# EAGLE board TGO-Panel (EAGLE 9.1.3), part 1 of 2
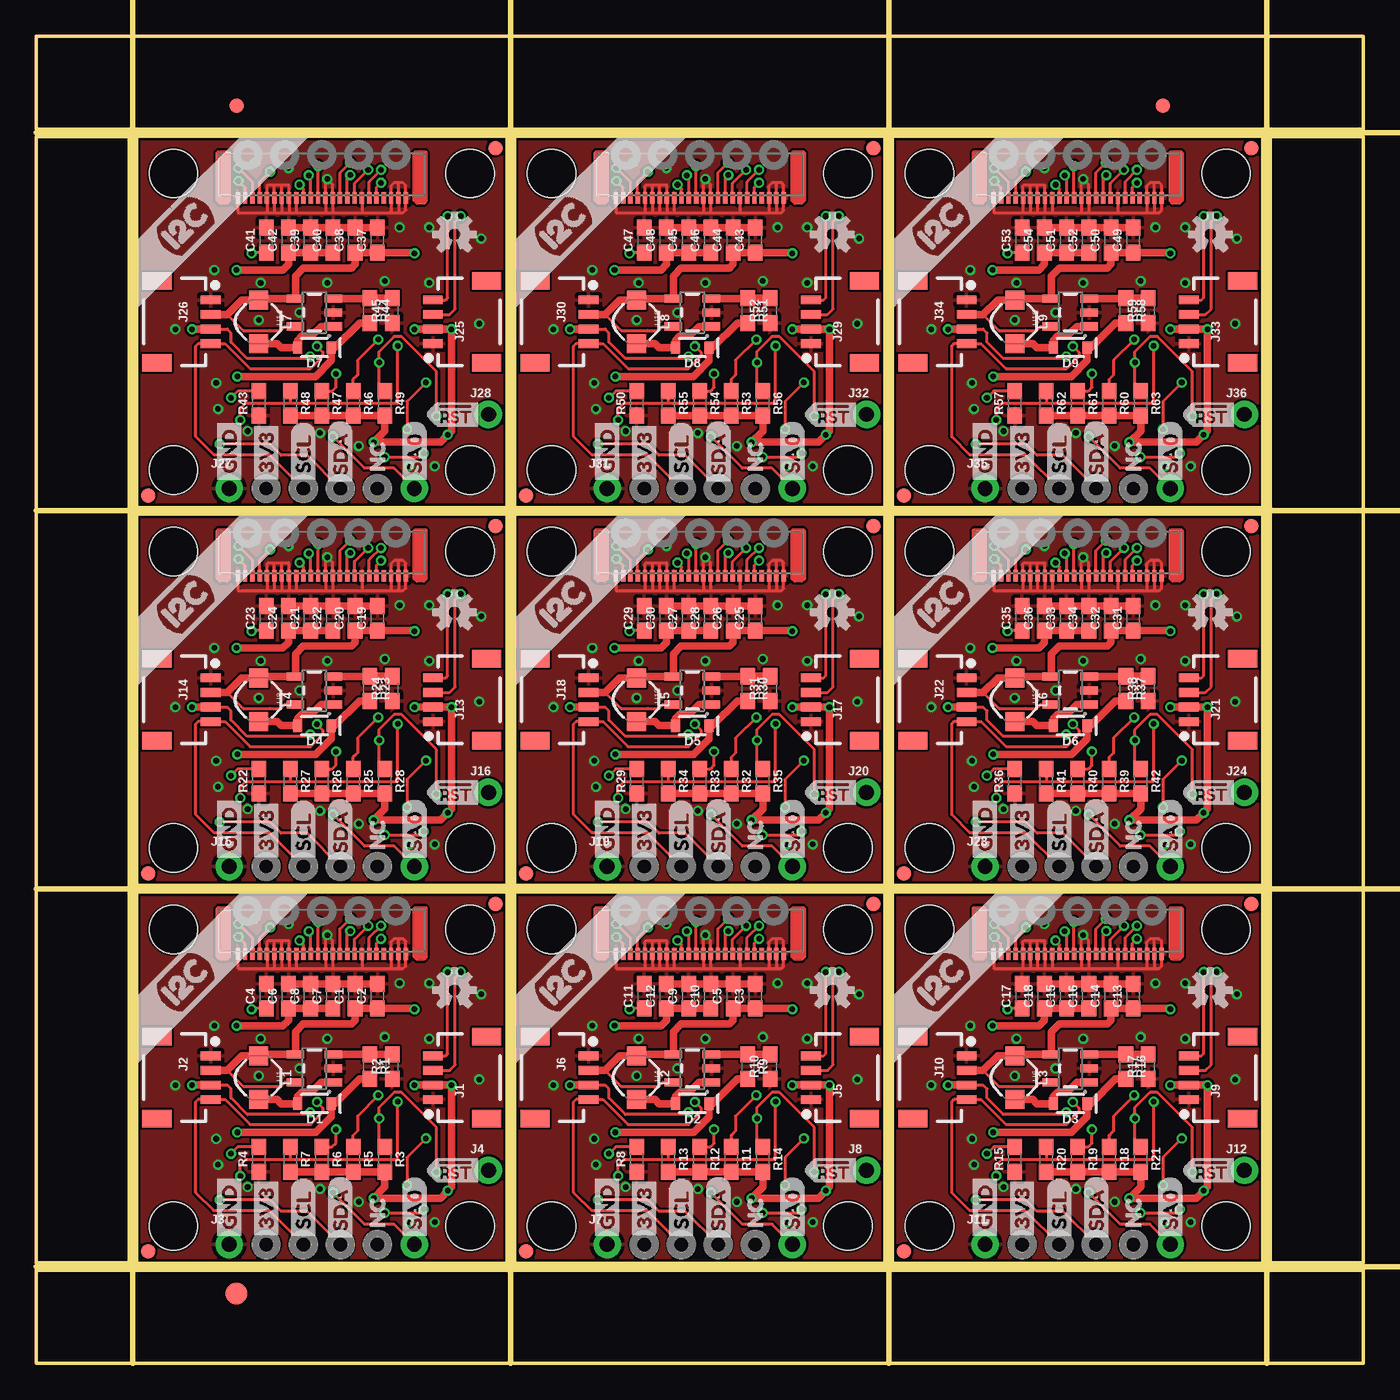
[diagram p0: board, top side]
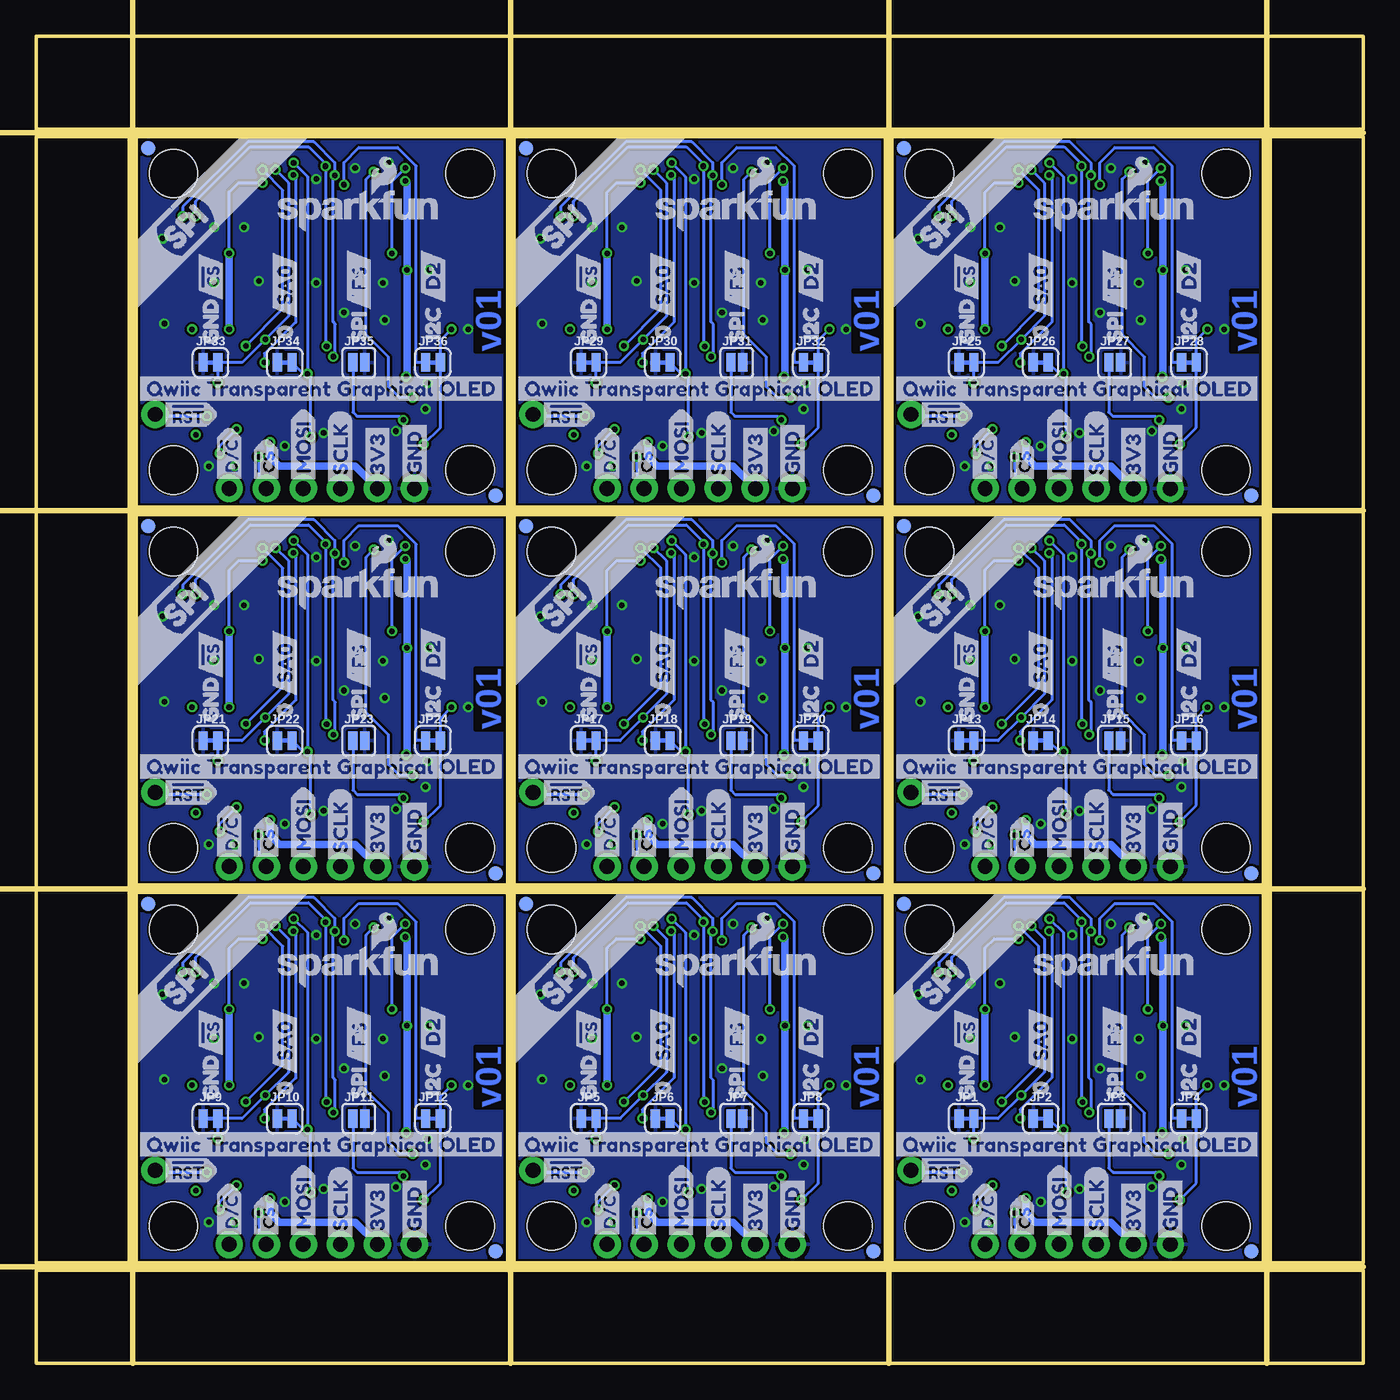
[diagram p1: board, bottom side, seen from below]

Size 90.93 x 90.93 mm. Coordinates in mm from the lower left corner, seen from the top.
Outline: 6.86,6.86 32.26,6.86 32.26,32.26 6.86,32.26 6.86,6.86
Outline: 32.77,6.86 58.17,6.86 58.17,32.26 32.77,32.26 32.77,6.86
Outline: 58.67,6.86 84.07,6.86 84.07,32.26 58.67,32.26 58.67,6.86
Outline: 6.86,32.77 32.26,32.77 32.26,58.17 6.86,58.17 6.86,32.77
Outline: 32.77,32.77 58.17,32.77 58.17,58.17 32.77,58.17 32.77,32.77
Outline: 58.67,32.77 84.07,32.77 84.07,58.17 58.67,58.17 58.67,32.77
Outline: 6.86,58.67 32.26,58.67 32.26,84.07 6.86,84.07 6.86,58.67
Outline: 32.77,58.67 58.17,58.67 58.17,84.07 32.77,84.07 32.77,58.67
Outline: 58.67,58.67 84.07,58.67 84.07,84.07 58.67,84.07 58.67,58.67
Outline: 0,6.35 90.93,6.35 90.93,0 0,0 0,6.35
Outline: 84.58,84.07 90.93,84.07 90.93,6.86 84.58,6.86 84.58,84.07
Outline: 0,90.93 90.93,90.93 90.93,84.58 0,84.58 0,90.93
Outline: 0,84.07 6.35,84.07 6.35,6.86 0,6.86 0,84.07
Copper layers (1*16): Top 0.035mm / dielectric 1.5mm / Bottom 0.035mm
Design rules "SparkFun-2-layer-PCBWay-LIMIT": minimum track width 6mil, minimum drill 0.3mm, track to track 6mil, track to pad 6mil, pad to pad 6mil, via to via 6mil, smd to smd 6mil, copper to edge 6mil, drill to drill 6mil, minimum pad ring 6mil, minimum via ring 6mil, stop-mask expansion 4mil, vias tented up to drill 25mil, thermal gap 10mil
Milling: 8 lines

## Footprints (pad centres in the part's own frame; a part is rotated, then mirrored left to right if it is on the bottom)
0603 = smd 1.1 x 1: 1 -0.85,0; 2 0.85,0
SOD-323 = smd 0.63 x 0.83: A 1.15,0; C -1.15,0
FIDUCIAL-1X2 = smd 1 x 1: 1 0,0
FIDUCIAL-1.5X3 = smd 1.5 x 1.5: 1 0,0
1X04_1MM_RA = smd 0.6 x 1.35: 1 -1.5,0; 2 -0.5,0; 3 0.5,0; 4 1.5,0 | smd 1.2 x 2: NC1 2.8,-3.675; NC2 -2.8,-3.675
1X06_NO_SILK = drill 1.016 pad 1.88: 1 0,0; 2 2.54,0; 3 5.08,0; 4 7.62,0; 5 10.16,0; 6 12.7,0
1X01_NO_SILK = drill 1.016 pad 1.88: 1 0,0
SMT-JUMPER_2_NC_TRACE_SILK = smd 0.635 x 1.27: 1 -0.508,0; 2 0.508,0
SMT-JUMPER_2_NO_SILK = smd 0.635 x 1.27: 1 -0.406,0; 2 0.406,0
INDUCTOR_4.7UH = smd 1.3 x 1.3: P$1 -1.5,0; P$2 1.5,0
SOT23-5 = smd 0.55 x 1.2: 1 -0.95,-1.3; 2 0,-1.3; 3 0.95,-1.3; 4 0.95,1.3; 5 -0.95,1.3
FPC05024-42201 = smd 0.3 x 0.8: P$1 -5.75,0.4; P$2 -5.25,0.4; P$3 -4.75,0.4; P$4 -4.25,0.4; P$5 -3.75,0.4; P$6 -3.25,0.4; P$7 -2.75,0.4; P$8 -2.25,0.4; P$9 -1.75,0.4; P$10 -1.25,0.4; P$11 -0.75,0.4; P$12 -0.25,0.4; P$13 0.25,0.4; P$14 0.75,0.4; P$15 1.25,0.4; P$16 1.75,0.4; P$17 2.25,0.4; P$18 2.75,0.4; P$19 3.25,0.4; P$20 3.75,0.4; P$21 4.25,0.4; P$22 4.75,0.4; P$23 5.25,0.4; P$24 5.75,0.4
QWIIC_BOARD_MOUNT_HOLES = hole 3.302: -10.16,10.16; 10.16,10.16; 10.16,-10.16; -10.16,-10.16

## Placement (x,y rotation side)
C1  4.7uF  [0603]  21.84,25.15 90 top
C2  0.1uF  [0603]  23.37,25.15 90 top
C3  0.1uF  [0603]  49.28,25.15 90 top
C4  4.7uF  [0603]  15.75,25.15 90 top
C5  4.7uF  [0603]  47.75,25.15 90 top
C6  4.7uF  [0603]  17.27,25.15 90 top
C7  4.7uF  [0603]  20.32,25.15 90 top
C8  0.1uF  [0603]  18.8,25.15 90 top
C9  0.1uF  [0603]  44.7,25.15 90 top
C10  4.7uF  [0603]  46.23,25.15 90 top
C11  4.7uF  [0603]  41.66,25.15 90 top
C12  4.7uF  [0603]  43.18,25.15 90 top
C13  0.1uF  [0603]  75.18,25.15 90 top
C14  4.7uF  [0603]  73.66,25.15 90 top
C15  0.1uF  [0603]  70.61,25.15 90 top
C16  4.7uF  [0603]  72.14,25.15 90 top
C17  4.7uF  [0603]  67.56,25.15 90 top
C18  4.7uF  [0603]  69.09,25.15 90 top
C19  0.1uF  [0603]  23.37,51.05 90 top
C20  4.7uF  [0603]  21.84,51.05 90 top
C21  0.1uF  [0603]  18.8,51.05 90 top
C22  4.7uF  [0603]  20.32,51.05 90 top
C23  4.7uF  [0603]  15.75,51.05 90 top
C24  4.7uF  [0603]  17.27,51.05 90 top
C25  0.1uF  [0603]  49.28,51.05 90 top
C26  4.7uF  [0603]  47.75,51.05 90 top
C27  0.1uF  [0603]  44.7,51.05 90 top
C28  4.7uF  [0603]  46.23,51.05 90 top
C29  4.7uF  [0603]  41.66,51.05 90 top
C30  4.7uF  [0603]  43.18,51.05 90 top
C31  0.1uF  [0603]  75.18,51.05 90 top
C32  4.7uF  [0603]  73.66,51.05 90 top
C33  0.1uF  [0603]  70.61,51.05 90 top
C34  4.7uF  [0603]  72.14,51.05 90 top
C35  4.7uF  [0603]  67.56,51.05 90 top
C36  4.7uF  [0603]  69.09,51.05 90 top
C37  0.1uF  [0603]  23.37,76.96 90 top
C38  4.7uF  [0603]  21.84,76.96 90 top
C39  0.1uF  [0603]  18.8,76.96 90 top
C40  4.7uF  [0603]  20.32,76.96 90 top
C41  4.7uF  [0603]  15.75,76.96 90 top
C42  4.7uF  [0603]  17.27,76.96 90 top
C43  0.1uF  [0603]  49.28,76.96 90 top
C44  4.7uF  [0603]  47.75,76.96 90 top
C45  0.1uF  [0603]  44.7,76.96 90 top
C46  4.7uF  [0603]  46.23,76.96 90 top
C47  4.7uF  [0603]  41.66,76.96 90 top
C48  4.7uF  [0603]  43.18,76.96 90 top
C49  0.1uF  [0603]  75.18,76.96 90 top
C50  4.7uF  [0603]  73.66,76.96 90 top
C51  0.1uF  [0603]  70.61,76.96 90 top
C52  4.7uF  [0603]  72.14,76.96 90 top
C53  4.7uF  [0603]  67.56,76.96 90 top
C54  4.7uF  [0603]  69.09,76.96 90 top
D1  1A/23V/620mV  [SOD-323]  19.05,17.78 180 top
D2  1A/23V/620mV  [SOD-323]  44.96,17.78 180 top
D3  1A/23V/620mV  [SOD-323]  70.87,17.78 180 top
D4  1A/23V/620mV  [SOD-323]  19.05,43.69 180 top
D5  1A/23V/620mV  [SOD-323]  44.96,43.69 180 top
D6  1A/23V/620mV  [SOD-323]  70.87,43.69 180 top
D7  1A/23V/620mV  [SOD-323]  19.05,69.6 180 top
D8  1A/23V/620mV  [SOD-323]  44.96,69.6 180 top
D9  1A/23V/620mV  [SOD-323]  70.87,69.6 180 top
E$1  [FIDUCIAL-1X2]  13.72,86.17 0 top
E$2  [FIDUCIAL-1X2]  77.22,86.17 0 top
E$3  [FIDUCIAL-1.5X3]  13.72,4.76 0 top
FD1  FIDUCIAL1X2  [FIDUCIAL-1X2]  7.65,7.65 0 top
FD2  FIDUCIAL1X2  [FIDUCIAL-1X2]  7.65,7.65 0 bottom
FD3  FIDUCIAL1X2  [FIDUCIAL-1X2]  31.46,31.46 0 top
FD4  FIDUCIAL1X2  [FIDUCIAL-1X2]  31.46,31.46 0 bottom
FD5  FIDUCIAL1X2  [FIDUCIAL-1X2]  57.37,31.46 0 top
FD6  FIDUCIAL1X2  [FIDUCIAL-1X2]  33.56,7.65 0 top
FD7  FIDUCIAL1X2  [FIDUCIAL-1X2]  33.56,7.65 0 bottom
FD8  FIDUCIAL1X2  [FIDUCIAL-1X2]  57.37,31.46 0 bottom
FD9  FIDUCIAL1X2  [FIDUCIAL-1X2]  83.28,31.46 0 top
FD10  FIDUCIAL1X2  [FIDUCIAL-1X2]  59.47,7.65 0 top
FD11  FIDUCIAL1X2  [FIDUCIAL-1X2]  59.47,7.65 0 bottom
FD12  FIDUCIAL1X2  [FIDUCIAL-1X2]  83.28,31.46 0 bottom
FD13  FIDUCIAL1X2  [FIDUCIAL-1X2]  31.46,57.37 0 top
FD14  FIDUCIAL1X2  [FIDUCIAL-1X2]  7.65,33.56 0 top
FD15  FIDUCIAL1X2  [FIDUCIAL-1X2]  7.65,33.56 0 bottom
FD16  FIDUCIAL1X2  [FIDUCIAL-1X2]  31.46,57.37 0 bottom
FD17  FIDUCIAL1X2  [FIDUCIAL-1X2]  57.37,57.37 0 top
FD18  FIDUCIAL1X2  [FIDUCIAL-1X2]  33.56,33.56 0 top
FD19  FIDUCIAL1X2  [FIDUCIAL-1X2]  33.56,33.56 0 bottom
FD20  FIDUCIAL1X2  [FIDUCIAL-1X2]  57.37,57.37 0 bottom
FD21  FIDUCIAL1X2  [FIDUCIAL-1X2]  83.28,57.37 0 top
FD22  FIDUCIAL1X2  [FIDUCIAL-1X2]  59.47,33.56 0 top
FD23  FIDUCIAL1X2  [FIDUCIAL-1X2]  59.47,33.56 0 bottom
FD24  FIDUCIAL1X2  [FIDUCIAL-1X2]  83.28,57.37 0 bottom
FD25  FIDUCIAL1X2  [FIDUCIAL-1X2]  31.46,83.28 0 top
FD26  FIDUCIAL1X2  [FIDUCIAL-1X2]  7.65,59.47 0 top
FD27  FIDUCIAL1X2  [FIDUCIAL-1X2]  7.65,59.47 0 bottom
FD28  FIDUCIAL1X2  [FIDUCIAL-1X2]  31.46,83.28 0 bottom
FD29  FIDUCIAL1X2  [FIDUCIAL-1X2]  57.37,83.28 0 top
FD30  FIDUCIAL1X2  [FIDUCIAL-1X2]  33.56,59.47 0 top
FD31  FIDUCIAL1X2  [FIDUCIAL-1X2]  33.56,59.47 0 bottom
FD32  FIDUCIAL1X2  [FIDUCIAL-1X2]  57.37,83.28 0 bottom
FD33  FIDUCIAL1X2  [FIDUCIAL-1X2]  83.28,83.28 0 top
FD34  FIDUCIAL1X2  [FIDUCIAL-1X2]  59.47,59.47 0 top
FD35  FIDUCIAL1X2  [FIDUCIAL-1X2]  59.47,59.47 0 bottom
FD36  FIDUCIAL1X2  [FIDUCIAL-1X2]  83.28,83.28 0 bottom
J1  [1X04_1MM_RA]  27.18,19.56 90 top
J2  [1X04_1MM_RA]  11.94,19.56 270 top
J3  [1X06_NO_SILK]  13.21,8.13 0 top
J4  [1X01_NO_SILK]  30.99,13.21 0 top
J5  [1X04_1MM_RA]  53.09,19.56 90 top
J6  [1X04_1MM_RA]  37.85,19.56 270 top
J7  [1X06_NO_SILK]  39.12,8.13 0 top
J8  [1X01_NO_SILK]  56.9,13.21 0 top
J9  [1X04_1MM_RA]  78.99,19.56 90 top
J10  [1X04_1MM_RA]  63.75,19.56 270 top
J11  [1X06_NO_SILK]  65.02,8.13 0 top
J12  [1X01_NO_SILK]  82.8,13.21 0 top
J13  [1X04_1MM_RA]  27.18,45.47 90 top
J14  [1X04_1MM_RA]  11.94,45.47 270 top
J15  [1X06_NO_SILK]  13.21,34.04 0 top
J16  [1X01_NO_SILK]  30.99,39.12 0 top
J17  [1X04_1MM_RA]  53.09,45.47 90 top
J18  [1X04_1MM_RA]  37.85,45.47 270 top
J19  [1X06_NO_SILK]  39.12,34.04 0 top
J20  [1X01_NO_SILK]  56.9,39.12 0 top
J21  [1X04_1MM_RA]  78.99,45.47 90 top
J22  [1X04_1MM_RA]  63.75,45.47 270 top
J23  [1X06_NO_SILK]  65.02,34.04 0 top
J24  [1X01_NO_SILK]  82.8,39.12 0 top
J25  [1X04_1MM_RA]  27.18,71.37 90 top
J26  [1X04_1MM_RA]  11.94,71.37 270 top
J27  [1X06_NO_SILK]  13.21,59.94 0 top
J28  [1X01_NO_SILK]  30.99,65.02 0 top
J29  [1X04_1MM_RA]  53.09,71.37 90 top
J30  [1X04_1MM_RA]  37.85,71.37 270 top
J31  [1X06_NO_SILK]  39.12,59.94 0 top
J32  [1X01_NO_SILK]  56.9,65.02 0 top
J33  [1X04_1MM_RA]  78.99,71.37 90 top
J34  [1X04_1MM_RA]  63.75,71.37 270 top
J35  [1X06_NO_SILK]  65.02,59.94 0 top
J36  [1X01_NO_SILK]  82.8,65.02 0 top
JP1  CSP  [SMT-JUMPER_2_NC_TRACE_SILK]  27.18,16.76 0 bottom
JP2  SAS  [SMT-JUMPER_2_NC_TRACE_SILK]  22.1,16.76 0 bottom
JP3  IFS  [SMT-JUMPER_2_NO_SILK]  17.02,16.76 0 bottom
JP4  I2C  [SMT-JUMPER_2_NC_TRACE_SILK]  11.94,16.76 0 bottom
JP5  CSP  [SMT-JUMPER_2_NC_TRACE_SILK]  53.09,16.76 0 bottom
JP6  SAS  [SMT-JUMPER_2_NC_TRACE_SILK]  48.01,16.76 0 bottom
JP7  IFS  [SMT-JUMPER_2_NO_SILK]  42.93,16.76 0 bottom
JP8  I2C  [SMT-JUMPER_2_NC_TRACE_SILK]  37.85,16.76 0 bottom
JP9  CSP  [SMT-JUMPER_2_NC_TRACE_SILK]  78.99,16.76 0 bottom
JP10  SAS  [SMT-JUMPER_2_NC_TRACE_SILK]  73.91,16.76 0 bottom
JP11  IFS  [SMT-JUMPER_2_NO_SILK]  68.83,16.76 0 bottom
JP12  I2C  [SMT-JUMPER_2_NC_TRACE_SILK]  63.75,16.76 0 bottom
JP13  CSP  [SMT-JUMPER_2_NC_TRACE_SILK]  27.18,42.67 0 bottom
JP14  SAS  [SMT-JUMPER_2_NC_TRACE_SILK]  22.1,42.67 0 bottom
JP15  IFS  [SMT-JUMPER_2_NO_SILK]  17.02,42.67 0 bottom
JP16  I2C  [SMT-JUMPER_2_NC_TRACE_SILK]  11.94,42.67 0 bottom
JP17  CSP  [SMT-JUMPER_2_NC_TRACE_SILK]  53.09,42.67 0 bottom
JP18  SAS  [SMT-JUMPER_2_NC_TRACE_SILK]  48.01,42.67 0 bottom
JP19  IFS  [SMT-JUMPER_2_NO_SILK]  42.93,42.67 0 bottom
JP20  I2C  [SMT-JUMPER_2_NC_TRACE_SILK]  37.85,42.67 0 bottom
JP21  CSP  [SMT-JUMPER_2_NC_TRACE_SILK]  78.99,42.67 0 bottom
JP22  SAS  [SMT-JUMPER_2_NC_TRACE_SILK]  73.91,42.67 0 bottom
JP23  IFS  [SMT-JUMPER_2_NO_SILK]  68.83,42.67 0 bottom
JP24  I2C  [SMT-JUMPER_2_NC_TRACE_SILK]  63.75,42.67 0 bottom
JP25  CSP  [SMT-JUMPER_2_NC_TRACE_SILK]  27.18,68.58 0 bottom
JP26  SAS  [SMT-JUMPER_2_NC_TRACE_SILK]  22.1,68.58 0 bottom
JP27  IFS  [SMT-JUMPER_2_NO_SILK]  17.02,68.58 0 bottom
JP28  I2C  [SMT-JUMPER_2_NC_TRACE_SILK]  11.94,68.58 0 bottom
JP29  CSP  [SMT-JUMPER_2_NC_TRACE_SILK]  53.09,68.58 0 bottom
JP30  SAS  [SMT-JUMPER_2_NC_TRACE_SILK]  48.01,68.58 0 bottom
JP31  IFS  [SMT-JUMPER_2_NO_SILK]  42.93,68.58 0 bottom
JP32  I2C  [SMT-JUMPER_2_NC_TRACE_SILK]  37.85,68.58 0 bottom
JP33  CSP  [SMT-JUMPER_2_NC_TRACE_SILK]  78.99,68.58 0 bottom
JP34  SAS  [SMT-JUMPER_2_NC_TRACE_SILK]  73.91,68.58 0 bottom
JP35  IFS  [SMT-JUMPER_2_NO_SILK]  68.83,68.58 0 bottom
JP36  I2C  [SMT-JUMPER_2_NC_TRACE_SILK]  63.75,68.58 0 bottom
L1  10uH  [INDUCTOR_4.7UH]  15.24,19.56 270 top
L2  10uH  [INDUCTOR_4.7UH]  41.15,19.56 270 top
L3  10uH  [INDUCTOR_4.7UH]  67.06,19.56 270 top
L4  10uH  [INDUCTOR_4.7UH]  15.24,45.47 270 top
L5  10uH  [INDUCTOR_4.7UH]  41.15,45.47 270 top
L6  10uH  [INDUCTOR_4.7UH]  67.06,45.47 270 top
L7  10uH  [INDUCTOR_4.7UH]  15.24,71.37 270 top
L8  10uH  [INDUCTOR_4.7UH]  41.15,71.37 270 top
L9  10uH  [INDUCTOR_4.7UH]  67.06,71.37 270 top
LOGO1  SFE_LOGO_NAME_FLAME.1_INCH  [SFE_LOGO_NAME_FLAME_.1]  17.02,27.18 0 bottom
LOGO2  OSHW-LOGOS  [OSHW-LOGO-S]  28.65,25.55 0 top
LOGO3  OSHW-LOGOS  [OSHW-LOGO-S]  54.56,25.55 0 top
LOGO4  SFE_LOGO_NAME_FLAME.1_INCH  [SFE_LOGO_NAME_FLAME_.1]  42.93,27.18 0 bottom
LOGO5  OSHW-LOGOS  [OSHW-LOGO-S]  80.47,25.55 0 top
LOGO6  SFE_LOGO_NAME_FLAME.1_INCH  [SFE_LOGO_NAME_FLAME_.1]  68.83,27.18 0 bottom
LOGO7  OSHW-LOGOS  [OSHW-LOGO-S]  28.65,51.46 0 top
LOGO8  SFE_LOGO_NAME_FLAME.1_INCH  [SFE_LOGO_NAME_FLAME_.1]  17.02,53.09 0 bottom
LOGO9  OSHW-LOGOS  [OSHW-LOGO-S]  54.56,51.46 0 top
LOGO10  SFE_LOGO_NAME_FLAME.1_INCH  [SFE_LOGO_NAME_FLAME_.1]  42.93,53.09 0 bottom
LOGO11  OSHW-LOGOS  [OSHW-LOGO-S]  80.47,51.46 0 top
LOGO12  SFE_LOGO_NAME_FLAME.1_INCH  [SFE_LOGO_NAME_FLAME_.1]  68.83,53.09 0 bottom
LOGO13  OSHW-LOGOS  [OSHW-LOGO-S]  28.65,77.37 0 top
LOGO14  SFE_LOGO_NAME_FLAME.1_INCH  [SFE_LOGO_NAME_FLAME_.1]  17.02,78.99 0 bottom
LOGO15  OSHW-LOGOS  [OSHW-LOGO-S]  54.56,77.37 0 top
LOGO16  SFE_LOGO_NAME_FLAME.1_INCH  [SFE_LOGO_NAME_FLAME_.1]  42.93,78.99 0 bottom
LOGO17  OSHW-LOGOS  [OSHW-LOGO-S]  80.47,77.37 0 top
LOGO18  SFE_LOGO_NAME_FLAME.1_INCH  [SFE_LOGO_NAME_FLAME_.1]  68.83,78.99 0 bottom
R1  47k  [0603]  22.86,20.32 270 top
R2  5.6k  [0603]  24.38,20.32 90 top
R3  10k  [0603]  23.88,13.97 270 top
R4  100k  [0603]  15.24,13.97 90 top
R5  10k  [0603]  21.72,13.97 270 top
R6  10k  [0603]  19.56,13.97 270 top
R7  10k  [0603]  17.4,13.97 270 top
R8  100k  [0603]  41.15,13.97 90 top
R9  47k  [0603]  48.77,20.32 270 top
R10  5.6k  [0603]  50.29,20.32 90 top
R11  10k  [0603]  47.62,13.97 270 top
R12  10k  [0603]  45.47,13.97 270 top
R13  10k  [0603]  43.31,13.97 270 top
R14  10k  [0603]  49.78,13.97 270 top
R15  100k  [0603]  67.06,13.97 90 top
R16  47k  [0603]  74.68,20.32 270 top
R17  5.6k  [0603]  76.2,20.32 90 top
R18  10k  [0603]  73.53,13.97 270 top
R19  10k  [0603]  71.37,13.97 270 top
R20  10k  [0603]  69.22,13.97 270 top
R21  10k  [0603]  75.69,13.97 270 top
R22  100k  [0603]  15.24,39.88 90 top
R23  47k  [0603]  22.86,46.23 270 top
R24  5.6k  [0603]  24.38,46.23 90 top
R25  10k  [0603]  21.72,39.88 270 top
R26  10k  [0603]  19.56,39.88 270 top
R27  10k  [0603]  17.4,39.88 270 top
R28  10k  [0603]  23.88,39.88 270 top
R29  100k  [0603]  41.15,39.88 90 top
R30  47k  [0603]  48.77,46.23 270 top
R31  5.6k  [0603]  50.29,46.23 90 top
R32  10k  [0603]  47.62,39.88 270 top
R33  10k  [0603]  45.47,39.88 270 top
R34  10k  [0603]  43.31,39.88 270 top
R35  10k  [0603]  49.78,39.88 270 top
R36  100k  [0603]  67.06,39.88 90 top
R37  47k  [0603]  74.68,46.23 270 top
R38  5.6k  [0603]  76.2,46.23 90 top
R39  10k  [0603]  73.53,39.88 270 top
R40  10k  [0603]  71.37,39.88 270 top
R41  10k  [0603]  69.22,39.88 270 top
R42  10k  [0603]  75.69,39.88 270 top
R43  100k  [0603]  15.24,65.79 90 top
R44  47k  [0603]  22.86,72.14 270 top
R45  5.6k  [0603]  24.38,72.14 90 top
R46  10k  [0603]  21.72,65.79 270 top
R47  10k  [0603]  19.56,65.79 270 top
R48  10k  [0603]  17.4,65.79 270 top
R49  10k  [0603]  23.88,65.79 270 top
R50  100k  [0603]  41.15,65.79 90 top
R51  47k  [0603]  48.77,72.14 270 top
R52  5.6k  [0603]  50.29,72.14 90 top
R53  10k  [0603]  47.62,65.79 270 top
R54  10k  [0603]  45.47,65.79 270 top
R55  10k  [0603]  43.31,65.79 270 top
R56  10k  [0603]  49.78,65.79 270 top
R57  100k  [0603]  67.06,65.79 90 top
R58  47k  [0603]  74.68,72.14 270 top
R59  5.6k  [0603]  76.2,72.14 90 top
R60  10k  [0603]  73.53,65.79 270 top
R61  10k  [0603]  71.37,65.79 270 top
R62  10k  [0603]  69.22,65.79 270 top
R63  10k  [0603]  75.69,65.79 270 top
U1  AP3012  [SOT23-5]  19.05,20.19 90 top
U2  SAS1-1U001-A_I2C_4WSPI  [FPC05024-42201]  19.56,28.45 180 top
U3  SAS1-1U001-A_I2C_4WSPI  [FPC05024-42201]  45.47,28.45 180 top
U4  AP3012  [SOT23-5]  44.96,20.19 90 top
U5  SAS1-1U001-A_I2C_4WSPI  [FPC05024-42201]  71.37,28.45 180 top
U6  AP3012  [SOT23-5]  70.87,20.19 90 top
U7  SAS1-1U001-A_I2C_4WSPI  [FPC05024-42201]  19.56,54.36 180 top
U8  AP3012  [SOT23-5]  19.05,46.1 90 top
U9  SAS1-1U001-A_I2C_4WSPI  [FPC05024-42201]  45.47,54.36 180 top
U10  AP3012  [SOT23-5]  44.96,46.1 90 top
U11  SAS1-1U001-A_I2C_4WSPI  [FPC05024-42201]  71.37,54.36 180 top
U12  AP3012  [SOT23-5]  70.87,46.1 90 top
U13  SAS1-1U001-A_I2C_4WSPI  [FPC05024-42201]  19.56,80.26 180 top
U14  AP3012  [SOT23-5]  19.05,72.01 90 top
U15  SAS1-1U001-A_I2C_4WSPI  [FPC05024-42201]  45.47,80.26 180 top
U16  AP3012  [SOT23-5]  44.96,72.01 90 top
U17  SAS1-1U001-A_I2C_4WSPI  [FPC05024-42201]  71.37,80.26 180 top
U18  AP3012  [SOT23-5]  70.87,72.01 90 top
U$1  QWIIC_BOARD_OUTLINEH  [QWIIC_BOARD_MOUNT_HOLES]  19.56,19.56 0 top
U$2  [QWIIC_TRANSPARENT_GRAPHICAL_OLED15]  32.51,14.99 0 bottom
U$3  [D27]  11.94,20.83 90 bottom
U$4  [GND0]  13.21,8.25 90 top
U$5  [3V31]  15.75,8.25 90 top
U$6  [SCL2]  18.29,8.25 90 top
U$7  [SDA3]  20.83,8.13 90 top
U$8  [#CS7]  23.37,8.13 90 bottom
U$9  [NC10]  23.37,8.38 90 top
U$10  [MOSI9]  20.83,8.25 90 bottom
U$11  [SCLK8]  18.29,8.13 90 bottom
U$12  [SA08]  25.91,8.25 90 top
U$13  [3V31]  15.75,8.13 90 bottom
U$14  [GND0]  13.21,8.13 90 bottom
U$15  [D##C6]  25.91,8.13 90 bottom
U$16  [GND10]  27.18,17.14 90 bottom
U$17  [#RST1]  30.89,13.21 0 bottom
U$18  [013]  22.1,17.53 90 bottom
U$19  [I2C3]  8,24 45 top
U$20  [D27]  17.02,20.83 90 bottom
U$21  [SA05]  22.1,19.81 90 bottom
U$22  [I2C13]  11.94,17.4 90 bottom
U$23  [#CS4]  27.18,20.83 90 bottom
U$24  [SPI2]  30.99,24 45 bottom
U$25  QWIIC_BOARD_OUTLINEH  [QWIIC_BOARD_MOUNT_HOLES]  45.47,19.56 0 top
U$26  [IFS17]  17.02,20.32 90 bottom
U$27  [GND0]  39.12,8.25 90 top
U$28  [#RST0]  26.54,13.21 0 top
U$29  [SPI6]  17.02,17.27 90 bottom
U$30  [3V31]  41.66,8.25 90 top
U$31  [SCL2]  44.2,8.25 90 top
U$32  [SDA3]  46.74,8.13 90 top
U$33  [SA08]  51.82,8.25 90 top
U$34  [NC10]  49.28,8.38 90 top
U$35  [#CS7]  49.28,8.13 90 bottom
U$36  [MOSI9]  46.74,8.25 90 bottom
U$37  [SCLK8]  44.2,8.13 90 bottom
U$38  [3V31]  41.66,8.13 90 bottom
U$39  [GND0]  39.12,8.13 90 bottom
U$40  [D##C6]  51.82,8.13 90 bottom
U$41  [GND10]  53.09,17.14 90 bottom
U$42  [013]  48.01,17.53 90 bottom
U$43  [I2C13]  37.85,17.4 90 bottom
U$44  [QWIIC_TRANSPARENT_GRAPHICAL_OLED15]  58.42,14.99 0 bottom
U$45  [IFS17]  42.93,20.32 90 bottom
U$46  [#RST0]  52.45,13.21 0 top
U$47  [#RST1]  56.79,13.21 0 bottom
U$48  [I2C3]  33.91,24 45 top
U$49  [SPI2]  56.9,24 45 bottom
U$50  [SA05]  48.01,19.81 90 bottom
U$51  [#CS4]  53.09,20.83 90 bottom
U$52  [SPI6]  42.93,17.27 90 bottom
U$53  [D27]  37.85,20.83 90 bottom
U$54  [D27]  42.93,20.83 90 bottom
U$55  QWIIC_BOARD_OUTLINEH  [QWIIC_BOARD_MOUNT_HOLES]  71.37,19.56 0 top
U$56  [GND0]  65.02,8.25 90 top
U$57  [3V31]  67.56,8.25 90 top
U$58  [SCL2]  70.1,8.25 90 top
U$59  [SDA3]  72.64,8.13 90 top
U$60  [SA08]  77.72,8.25 90 top
U$61  [NC10]  75.18,8.38 90 top
U$62  [#CS7]  75.18,8.13 90 bottom
U$63  [MOSI9]  72.64,8.25 90 bottom
U$64  [SCLK8]  70.1,8.13 90 bottom
U$65  [3V31]  67.56,8.13 90 bottom
U$66  [GND0]  65.02,8.13 90 bottom
U$67  [D##C6]  77.72,8.13 90 bottom
U$68  [GND10]  78.99,17.14 90 bottom
U$69  [013]  73.91,17.53 90 bottom
U$70  [I2C13]  63.75,17.4 90 bottom
U$71  [QWIIC_TRANSPARENT_GRAPHICAL_OLED15]  84.33,14.99 0 bottom
U$72  [IFS17]  68.83,20.32 90 bottom
U$73  [#RST0]  78.36,13.21 0 top
U$74  [#RST1]  82.7,13.21 0 bottom
U$75  [I2C3]  59.82,24 45 top
U$76  [SPI2]  82.8,24 45 bottom
U$77  [SA05]  73.91,19.81 90 bottom
U$78  [#CS4]  78.99,20.83 90 bottom
U$79  [SPI6]  68.83,17.27 90 bottom
U$80  [D27]  63.75,20.83 90 bottom
U$81  [D27]  68.83,20.83 90 bottom
U$82  QWIIC_BOARD_OUTLINEH  [QWIIC_BOARD_MOUNT_HOLES]  19.56,45.47 0 top
U$83  [GND0]  13.21,34.16 90 top
U$84  [3V31]  15.75,34.16 90 top
U$85  [SCL2]  18.29,34.16 90 top
U$86  [SDA3]  20.83,34.04 90 top
U$87  [SA08]  25.91,34.16 90 top
U$88  [NC10]  23.37,34.29 90 top
U$89  [#CS7]  23.37,34.04 90 bottom
U$90  [MOSI9]  20.83,34.16 90 bottom
U$91  [SCLK8]  18.29,34.04 90 bottom
U$92  [3V31]  15.75,34.04 90 bottom
U$93  [GND0]  13.21,34.04 90 bottom
U$94  [D##C6]  25.91,34.04 90 bottom
U$95  [GND10]  27.18,43.05 90 bottom
U$96  [013]  22.1,43.43 90 bottom
U$97  [I2C13]  11.94,43.31 90 bottom
U$98  [QWIIC_TRANSPARENT_GRAPHICAL_OLED15]  32.51,40.89 0 bottom
U$99  [IFS17]  17.02,46.23 90 bottom
U$100  [#RST0]  26.54,39.12 0 top
U$101  [#RST1]  30.89,39.12 0 bottom
U$102  [I2C3]  8,49.91 45 top
U$103  [SPI2]  30.99,49.91 45 bottom
U$104  [SA05]  22.1,45.72 90 bottom
U$105  [#CS4]  27.18,46.74 90 bottom
U$106  [SPI6]  17.02,43.18 90 bottom
U$107  [D27]  11.94,46.74 90 bottom
U$108  [D27]  17.02,46.74 90 bottom
U$109  QWIIC_BOARD_OUTLINEH  [QWIIC_BOARD_MOUNT_HOLES]  45.47,45.47 0 top
U$110  [GND0]  39.12,34.16 90 top
U$111  [3V31]  41.66,34.16 90 top
U$112  [SCL2]  44.2,34.16 90 top
U$113  [SDA3]  46.74,34.04 90 top
U$114  [SA08]  51.82,34.16 90 top
U$115  [NC10]  49.28,34.29 90 top
U$116  [#CS7]  49.28,34.04 90 bottom
U$117  [MOSI9]  46.74,34.16 90 bottom
U$118  [SCLK8]  44.2,34.04 90 bottom
U$119  [3V31]  41.66,34.04 90 bottom
U$120  [GND0]  39.12,34.04 90 bottom
U$121  [D##C6]  51.82,34.04 90 bottom
U$122  [GND10]  53.09,43.05 90 bottom
U$123  [013]  48.01,43.43 90 bottom
U$124  [I2C13]  37.85,43.31 90 bottom
U$125  [QWIIC_TRANSPARENT_GRAPHICAL_OLED15]  58.42,40.89 0 bottom
U$126  [IFS17]  42.93,46.23 90 bottom
U$127  [#RST0]  52.45,39.12 0 top
U$128  [#RST1]  56.79,39.12 0 bottom
U$129  [I2C3]  33.91,49.91 45 top
U$130  [SPI2]  56.9,49.91 45 bottom
U$131  [SA05]  48.01,45.72 90 bottom
U$132  [#CS4]  53.09,46.74 90 bottom
U$133  [SPI6]  42.93,43.18 90 bottom
U$134  [D27]  37.85,46.74 90 bottom
U$135  [D27]  42.93,46.74 90 bottom
U$136  QWIIC_BOARD_OUTLINEH  [QWIIC_BOARD_MOUNT_HOLES]  71.37,45.47 0 top
U$137  [GND0]  65.02,34.16 90 top
U$138  [3V31]  67.56,34.16 90 top
U$139  [SCL2]  70.1,34.16 90 top
U$140  [SDA3]  72.64,34.04 90 top
U$141  [SA08]  77.72,34.16 90 top
U$142  [NC10]  75.18,34.29 90 top
U$143  [#CS7]  75.18,34.04 90 bottom
U$144  [MOSI9]  72.64,34.16 90 bottom
U$145  [SCLK8]  70.1,34.04 90 bottom
U$146  [3V31]  67.56,34.04 90 bottom
U$147  [GND0]  65.02,34.04 90 bottom
U$148  [D##C6]  77.72,34.04 90 bottom
U$149  [GND10]  78.99,43.05 90 bottom
U$150  [013]  73.91,43.43 90 bottom
U$151  [I2C13]  63.75,43.31 90 bottom
U$152  [QWIIC_TRANSPARENT_GRAPHICAL_OLED15]  84.33,40.89 0 bottom
U$153  [IFS17]  68.83,46.23 90 bottom
U$154  [#RST0]  78.36,39.12 0 top
U$155  [#RST1]  82.7,39.12 0 bottom
U$156  [I2C3]  59.82,49.91 45 top
U$157  [SPI2]  82.8,49.91 45 bottom
U$158  [SA05]  73.91,45.72 90 bottom
U$159  [#CS4]  78.99,46.74 90 bottom
U$160  [SPI6]  68.83,43.18 90 bottom
U$161  [D27]  63.75,46.74 90 bottom
U$162  [D27]  68.83,46.74 90 bottom
U$163  QWIIC_BOARD_OUTLINEH  [QWIIC_BOARD_MOUNT_HOLES]  19.56,71.37 0 top
U$164  [GND0]  13.21,60.07 90 top
U$165  [3V31]  15.75,60.07 90 top
U$166  [SCL2]  18.29,60.07 90 top
U$167  [SDA3]  20.83,59.94 90 top
U$168  [SA08]  25.91,60.07 90 top
U$169  [NC10]  23.37,60.2 90 top
U$170  [#CS7]  23.37,59.94 90 bottom
U$171  [MOSI9]  20.83,60.07 90 bottom
U$172  [SCLK8]  18.29,59.94 90 bottom
U$173  [3V31]  15.75,59.94 90 bottom
U$174  [GND0]  13.21,59.94 90 bottom
U$175  [D##C6]  25.91,59.94 90 bottom
U$176  [GND10]  27.18,68.96 90 bottom
U$177  [013]  22.1,69.34 90 bottom
U$178  [I2C13]  11.94,69.22 90 bottom
U$179  [QWIIC_TRANSPARENT_GRAPHICAL_OLED15]  32.51,66.8 0 bottom
U$180  [IFS17]  17.02,72.14 90 bottom
U$181  [#RST0]  26.54,65.02 0 top
U$182  [#RST1]  30.89,65.02 0 bottom
U$183  [I2C3]  8,75.82 45 top
U$184  [SPI2]  30.99,75.82 45 bottom
U$185  [SA05]  22.1,71.63 90 bottom
U$186  [#CS4]  27.18,72.64 90 bottom
U$187  [SPI6]  17.02,69.09 90 bottom
U$188  [D27]  11.94,72.64 90 bottom
U$189  [D27]  17.02,72.64 90 bottom
U$190  QWIIC_BOARD_OUTLINEH  [QWIIC_BOARD_MOUNT_HOLES]  45.47,71.37 0 top
U$191  [GND0]  39.12,60.07 90 top
U$192  [3V31]  41.66,60.07 90 top
U$193  [SCL2]  44.2,60.07 90 top
U$194  [SDA3]  46.74,59.94 90 top
U$195  [SA08]  51.82,60.07 90 top
U$196  [NC10]  49.28,60.2 90 top
U$197  [#CS7]  49.28,59.94 90 bottom
U$198  [MOSI9]  46.74,60.07 90 bottom
U$199  [SCLK8]  44.2,59.94 90 bottom
U$200  [3V31]  41.66,59.94 90 bottom
U$201  [GND0]  39.12,59.94 90 bottom
U$202  [D##C6]  51.82,59.94 90 bottom
U$203  [GND10]  53.09,68.96 90 bottom
U$204  [013]  48.01,69.34 90 bottom
U$205  [I2C13]  37.85,69.22 90 bottom
U$206  [QWIIC_TRANSPARENT_GRAPHICAL_OLED15]  58.42,66.8 0 bottom
U$207  [IFS17]  42.93,72.14 90 bottom
U$208  [#RST0]  52.45,65.02 0 top
U$209  [#RST1]  56.79,65.02 0 bottom
U$210  [I2C3]  33.91,75.82 45 top
U$211  [SPI2]  56.9,75.82 45 bottom
U$212  [SA05]  48.01,71.63 90 bottom
U$213  [#CS4]  53.09,72.64 90 bottom
U$214  [SPI6]  42.93,69.09 90 bottom
U$215  [D27]  37.85,72.64 90 bottom
U$216  [D27]  42.93,72.64 90 bottom
U$217  QWIIC_BOARD_OUTLINEH  [QWIIC_BOARD_MOUNT_HOLES]  71.37,71.37 0 top
U$218  [GND0]  65.02,60.07 90 top
U$219  [3V31]  67.56,60.07 90 top
U$220  [SCL2]  70.1,60.07 90 top
U$221  [SDA3]  72.64,59.94 90 top
U$222  [SA08]  77.72,60.07 90 top
U$223  [NC10]  75.18,60.2 90 top
U$224  [#CS7]  75.18,59.94 90 bottom
U$225  [MOSI9]  72.64,60.07 90 bottom
U$226  [SCLK8]  70.1,59.94 90 bottom
U$227  [3V31]  67.56,59.94 90 bottom
U$228  [GND0]  65.02,59.94 90 bottom
U$229  [D##C6]  77.72,59.94 90 bottom
U$230  [GND10]  78.99,68.96 90 bottom
U$231  [013]  73.91,69.34 90 bottom
U$232  [I2C13]  63.75,69.22 90 bottom
U$233  [QWIIC_TRANSPARENT_GRAPHICAL_OLED15]  84.33,66.8 0 bottom
U$234  [IFS17]  68.83,72.14 90 bottom
U$235  [#RST0]  78.36,65.02 0 top
U$236  [#RST1]  82.7,65.02 0 bottom
U$237  [I2C3]  59.82,75.82 45 top
U$238  [SPI2]  82.8,75.82 45 bottom
U$239  [SA05]  73.91,71.63 90 bottom
U$240  [#CS4]  78.99,72.64 90 bottom
U$241  [SPI6]  68.83,69.09 90 bottom
U$242  [D27]  63.75,72.64 90 bottom
U$243  [D27]  68.83,72.64 90 bottom

## Library data of the parts
C1 C4-C7 C10-C12 C14 C16-C18 C20 C22-C24 C26 C28-C30 C32 C34-C36 C38 C40-C42 C44 C46-C48 C50 C52-C54 = SparkFun-Capacitors; PROD_ID: CAP-14106
C2 C3 C8 C9 C13 C15 C19 C21 C25 C27 C31 C33 C37 C39 C43 C45 C49 C51 = SparkFun-Capacitors; PROD_ID: CAP-08390
D1-D9 = SparkFun-DiscreteSemi; PROD_ID: DIO-11623
E$1 E$2 FD1-FD36 LOGO1-LOGO18 = SparkFun-Aesthetics
E$3 = SparkFun-Retired
J1 J2 J5 J6 J9 J10 J13 J14 J17 J18 J21 J22 J25 J26 J29 J30 J33 J34 = SparkFun-Connectors; PROD_ID: CONN-13694
J3 J4 J7 J8 J11 J12 J15 J16 J19 J20 J23 J24 J27 J28 J31 J32 J35 J36 = SparkFun-Connectors
JP1-JP36 = SparkFun-Jumpers
L1-L9 = SparkFun-Coils; PROD_ID: NDUC-13968
R1 R9 R16 R23 R30 R37 R44 R51 R58 = SparkFun-Resistors; PROD_ID: RES-07871
R2 R10 R17 R24 R31 R38 R45 R52 R59 = SparkFun-Resistors; PROD_ID: RES-12378
R3 R5-R7 R11-R14 R18-R21 R25-R28 R32-R35 R39-R42 R46-R49 R53-R56 R60-R63 = SparkFun-Resistors; PROD_ID: RES-00824
R4 R8 R15 R22 R29 R36 R43 R50 R57 = SparkFun-Resistors; PROD_ID: RES-07828
U1 U4 U6 U8 U10 U12 U14 U16 U18 = SparkFun-IC-Power; PROD_ID: VREG-13911
U2 U3 U5 U7 U9 U11 U13 U15 U17 = TGO
U$1 U$25 U$55 U$82 U$109 U$136 U$163 U$190 U$217 = SparkX
U$2 U$4-U$16 U$18 U$22 U$26 U$27 U$30-U$45 U$56-U$72 U$83-U$99 U$110-U$126 U$137-U$153 U$164-U$180 U$191-U$207 U$218-U$234 = buzzard_labels
U$3 U$17 U$19-U$21 U$23 U$24 U$28 U$29 U$46-U$54 U$73-U$81 U$100-U$108 U$127-U$135 U$154-U$162 U$181-U$189 U$208-U$216 U$235-U$243 = buzzard_labels_1

## Nets
3.3V: C1.1 C2.1 J1.2 J2.2 J3.2 L1.P$1 R3.2 R5.2 R6.2 R7.2 U1.4 U1.5 U2.P$5
3.3V1: C3.1 C5.1 J5.2 J6.2 J7.2 L2.P$1 R11.2 R12.2 R13.2 R14.2 U3.P$5 U4.4 U4.5
3.3V2: C13.1 C14.1 J9.2 J10.2 J11.2 L3.P$1 R18.2 R19.2 R20.2 R21.2 U5.P$5 U6.4 U6.5
3.3V3: C19.1 C20.1 J13.2 J14.2 J15.2 L4.P$1 R25.2 R26.2 R27.2 R28.2 U7.P$5 U8.4 U8.5
3.3V4: C25.1 C26.1 J17.2 J18.2 J19.2 L5.P$1 R32.2 R33.2 R34.2 R35.2 U9.P$5 U10.4 U10.5
3.3V5: C31.1 C32.1 J21.2 J22.2 J23.2 L6.P$1 R39.2 R40.2 R41.2 R42.2 U11.P$5 U12.4 U12.5
3.3V6: C37.1 C38.1 J25.2 J26.2 J27.2 L7.P$1 R46.2 R47.2 R48.2 R49.2 U13.P$5 U14.4 U14.5
3.3V7: C43.1 C44.1 J29.2 J30.2 J31.2 L8.P$1 R53.2 R54.2 R55.2 R56.2 U15.P$5 U16.4 U16.5
3.3V8: C49.1 C50.1 J33.2 J34.2 J35.2 L9.P$1 R60.2 R61.2 R62.2 R63.2 U17.P$5 U18.4 U18.5
12V: C6.1 C7.1 C8.1 D1.C R1.2 U2.P$23
12V1: C9.1 C10.1 C12.1 D2.C R9.2 U3.P$23
12V2: C15.1 C16.1 C18.1 D3.C R16.2 U5.P$23
12V3: C21.1 C22.1 C24.1 D4.C R23.2 U7.P$23
12V4: C27.1 C28.1 C30.1 D5.C R30.2 U9.P$23
12V5: C33.1 C34.1 C36.1 D6.C R37.2 U11.P$23
12V6: C39.1 C40.1 C42.1 D7.C R44.2 U13.P$23
12V7: C45.1 C46.1 C48.1 D8.C R51.2 U15.P$23
12V8: C51.1 C52.1 C54.1 D9.C R58.2 U17.P$23
!CS: J3.5 JP1.2 R5.1 U2.P$8
!CS1: J7.5 JP5.2 R11.1 U3.P$8
!CS2: J11.5 JP9.2 R18.1 U5.P$8
!CS3: J15.5 JP13.2 R25.1 U7.P$8
!CS4: J19.5 JP17.2 R32.1 U9.P$8
!CS5: J23.5 JP21.2 R39.1 U11.P$8
!CS6: J27.5 JP25.2 R46.1 U13.P$8
!CS7: J31.5 JP29.2 R53.1 U15.P$8
!CS8: J35.5 JP33.2 R60.1 U17.P$8
!RES: J4.1 R3.1 U2.P$9
!RES1: J8.1 R14.1 U3.P$9
!RES2: J12.1 R21.1 U5.P$9
!RES3: J16.1 R28.1 U7.P$9
!RES4: J20.1 R35.1 U9.P$9
!RES5: J24.1 R42.1 U11.P$9
!RES6: J28.1 R49.1 U13.P$9
!RES7: J32.1 R56.1 U15.P$9
!RES8: J36.1 R63.1 U17.P$9
D!C!/SA0: J3.6 JP2.2 R6.1 U2.P$10
D!C!/SA1: J7.6 JP6.2 R12.1 U3.P$10
D!C!/SA2: J11.6 JP10.2 R19.1 U5.P$10
D!C!/SA3: J15.6 JP14.2 R26.1 U7.P$10
D!C!/SA4: J19.6 JP18.2 R33.1 U9.P$10
D!C!/SA5: J23.6 JP22.2 R40.1 U11.P$10
D!C!/SA6: J27.6 JP26.2 R47.1 U13.P$10
D!C!/SA7: J31.6 JP30.2 R54.1 U15.P$10
D!C!/SA8: J35.6 JP34.2 R61.1 U17.P$10
GND: C1.2 C2.2 C4.2 C6.2 C7.2 C8.2 J1.1 J2.1 J3.1 JP1.1 JP2.1 JP3.2 R2.1 R4.1 U1.2 U2.P$1 U2.P$2 U2.P$3 U2.P$7 U2.P$11 U2.P$12 U2.P$16 U2.P$17 U2.P$18 U2.P$19 U2.P$20 U2.P$24
GND1: C3.2 C5.2 C9.2 C10.2 C11.2 C12.2 J5.1 J6.1 J7.1 JP5.1 JP6.1 JP7.2 R8.1 R10.1 U3.P$1 U3.P$2 U3.P$3 U3.P$7 U3.P$11 U3.P$12 U3.P$16 U3.P$17 U3.P$18 U3.P$19 U3.P$20 U3.P$24 U4.2
GND2: C13.2 C14.2 C15.2 C16.2 C17.2 C18.2 J9.1 J10.1 J11.1 JP9.1 JP10.1 JP11.2 R15.1 R17.1 U5.P$1 U5.P$2 U5.P$3 U5.P$7 U5.P$11 U5.P$12 U5.P$16 U5.P$17 U5.P$18 U5.P$19 U5.P$20 U5.P$24 U6.2
GND3: C19.2 C20.2 C21.2 C22.2 C23.2 C24.2 J13.1 J14.1 J15.1 JP13.1 JP14.1 JP15.2 R22.1 R24.1 U7.P$1 U7.P$2 U7.P$3 U7.P$7 U7.P$11 U7.P$12 U7.P$16 U7.P$17 U7.P$18 U7.P$19 U7.P$20 U7.P$24 U8.2
GND4: C25.2 C26.2 C27.2 C28.2 C29.2 C30.2 J17.1 J18.1 J19.1 JP17.1 JP18.1 JP19.2 R29.1 R31.1 U9.P$1 U9.P$2 U9.P$3 U9.P$7 U9.P$11 U9.P$12 U9.P$16 U9.P$17 U9.P$18 U9.P$19 U9.P$20 U9.P$24 U10.2
GND5: C31.2 C32.2 C33.2 C34.2 C35.2 C36.2 J21.1 J22.1 J23.1 JP21.1 JP22.1 JP23.2 R36.1 R38.1 U11.P$1 U11.P$2 U11.P$3 U11.P$7 U11.P$11 U11.P$12 U11.P$16 U11.P$17 U11.P$18 U11.P$19 U11.P$20 U11.P$24 U12.2
GND6: C37.2 C38.2 C39.2 C40.2 C41.2 C42.2 J25.1 J26.1 J27.1 JP25.1 JP26.1 JP27.2 R43.1 R45.1 U13.P$1 U13.P$2 U13.P$3 U13.P$7 U13.P$11 U13.P$12 U13.P$16 U13.P$17 U13.P$18 U13.P$19 U13.P$20 U13.P$24 U14.2
GND7: C43.2 C44.2 C45.2 C46.2 C47.2 C48.2 J29.1 J30.1 J31.1 JP29.1 JP30.1 JP31.2 R50.1 R52.1 U15.P$1 U15.P$2 U15.P$3 U15.P$7 U15.P$11 U15.P$12 U15.P$16 U15.P$17 U15.P$18 U15.P$19 U15.P$20 U15.P$24 U16.2
GND8: C49.2 C50.2 C51.2 C52.2 C53.2 C54.2 J33.1 J34.1 J35.1 JP33.1 JP34.1 JP35.2 R57.1 R59.1 U17.P$1 U17.P$2 U17.P$3 U17.P$7 U17.P$11 U17.P$12 U17.P$16 U17.P$17 U17.P$18 U17.P$19 U17.P$20 U17.P$24 U18.2
I2C!4WSPI: JP3.1 R7.1 U2.P$6
I2C!4WSPI1: JP7.1 R13.1 U3.P$6
I2C!4WSPI2: JP11.1 R20.1 U5.P$6
I2C!4WSPI3: JP15.1 R27.1 U7.P$6
I2C!4WSPI4: JP19.1 R34.1 U9.P$6
I2C!4WSPI5: JP23.1 R41.1 U11.P$6
I2C!4WSPI6: JP27.1 R48.1 U13.P$6
I2C!4WSPI7: JP31.1 R55.1 U15.P$6
I2C!4WSPI8: JP35.1 R62.1 U17.P$6
N$1: R4.2 U2.P$21
N$2: C11.1 U3.P$22
N$3: C4.1 U2.P$22
N$4: D1.A L1.P$2 U1.1
N$5: R1.1 R2.2 U1.3
N$6: R8.2 U3.P$21
N$7: D2.A L2.P$2 U4.1
N$8: R9.1 R10.2 U4.3
N$9: C17.1 U5.P$22
N$10: R15.2 U5.P$21
N$11: D3.A L3.P$2 U6.1
N$12: R16.1 R17.2 U6.3
N$13: C23.1 U7.P$22
N$14: R22.2 U7.P$21
N$15: D4.A L4.P$2 U8.1
N$16: R23.1 R24.2 U8.3
N$17: C29.1 U9.P$22
N$18: R29.2 U9.P$21
N$19: D5.A L5.P$2 U10.1
N$20: R30.1 R31.2 U10.3
N$21: C35.1 U11.P$22
N$22: R36.2 U11.P$21
N$23: D6.A L6.P$2 U12.1
N$24: R37.1 R38.2 U12.3
N$25: C41.1 U13.P$22
N$26: R43.2 U13.P$21
N$27: D7.A L7.P$2 U14.1
N$28: R44.1 R45.2 U14.3
N$29: C47.1 U15.P$22
N$30: R50.2 U15.P$21
N$31: D8.A L8.P$2 U16.1
N$32: R51.1 R52.2 U16.3
N$33: C53.1 U17.P$22
N$34: R57.2 U17.P$21
N$35: D9.A L9.P$2 U18.1
N$36: R58.1 R59.2 U18.3
NC/D1: JP8.1 U3.P$15
NC/D2: JP4.1 U2.P$15
NC/D3: JP12.1 U5.P$15
NC/D4: JP16.1 U7.P$15
NC/D5: JP20.1 U9.P$15
NC/D6: JP24.1 U11.P$15
NC/D7: JP28.1 U13.P$15
NC/D8: JP32.1 U15.P$15
NC/D9: JP36.1 U17.P$15
SCLK/SCL: J1.4 J2.4 J3.3 U2.P$13
SCLK/SCL1: J5.4 J6.4 J7.3 U3.P$13
SCLK/SCL2: J9.4 J10.4 J11.3 U5.P$13
SCLK/SCL3: J13.4 J14.4 J15.3 U7.P$13
SCLK/SCL4: J17.4 J18.4 J19.3 U9.P$13
SCLK/SCL5: J21.4 J22.4 J23.3 U11.P$13
SCLK/SCL6: J25.4 J26.4 J27.3 U13.P$13
SCLK/SCL7: J29.4 J30.4 J31.3 U15.P$13
SCLK/SCL8: J33.4 J34.4 J35.3 U17.P$13
SDIN/SDA: J1.3 J2.3 J3.4 JP4.2 U2.P$14
SDIN/SDA1: J5.3 J6.3 J7.4 JP8.2 U3.P$14
SDIN/SDA2: J9.3 J10.3 J11.4 JP12.2 U5.P$14
SDIN/SDA3: J13.3 J14.3 J15.4 JP16.2 U7.P$14
SDIN/SDA4: J17.3 J18.3 J19.4 JP20.2 U9.P$14
SDIN/SDA5: J21.3 J22.3 J23.4 JP24.2 U11.P$14
SDIN/SDA6: J25.3 J26.3 J27.4 JP28.2 U13.P$14
SDIN/SDA7: J29.3 J30.3 J31.4 JP32.2 U15.P$14
SDIN/SDA8: J33.3 J34.3 J35.4 JP36.2 U17.P$14